# Altium PCB BOARD.PcbDoc
Units mm, origin at the board's own origin, x right, y up, seen from the top; angles counter-clockwise.
Board outline 48 x 20 mm, 2 copper layers (Top Layer, Bottom Layer), stack 1.18 mm thick; 22 components, 17 nets, 78 pads, 4 vias.
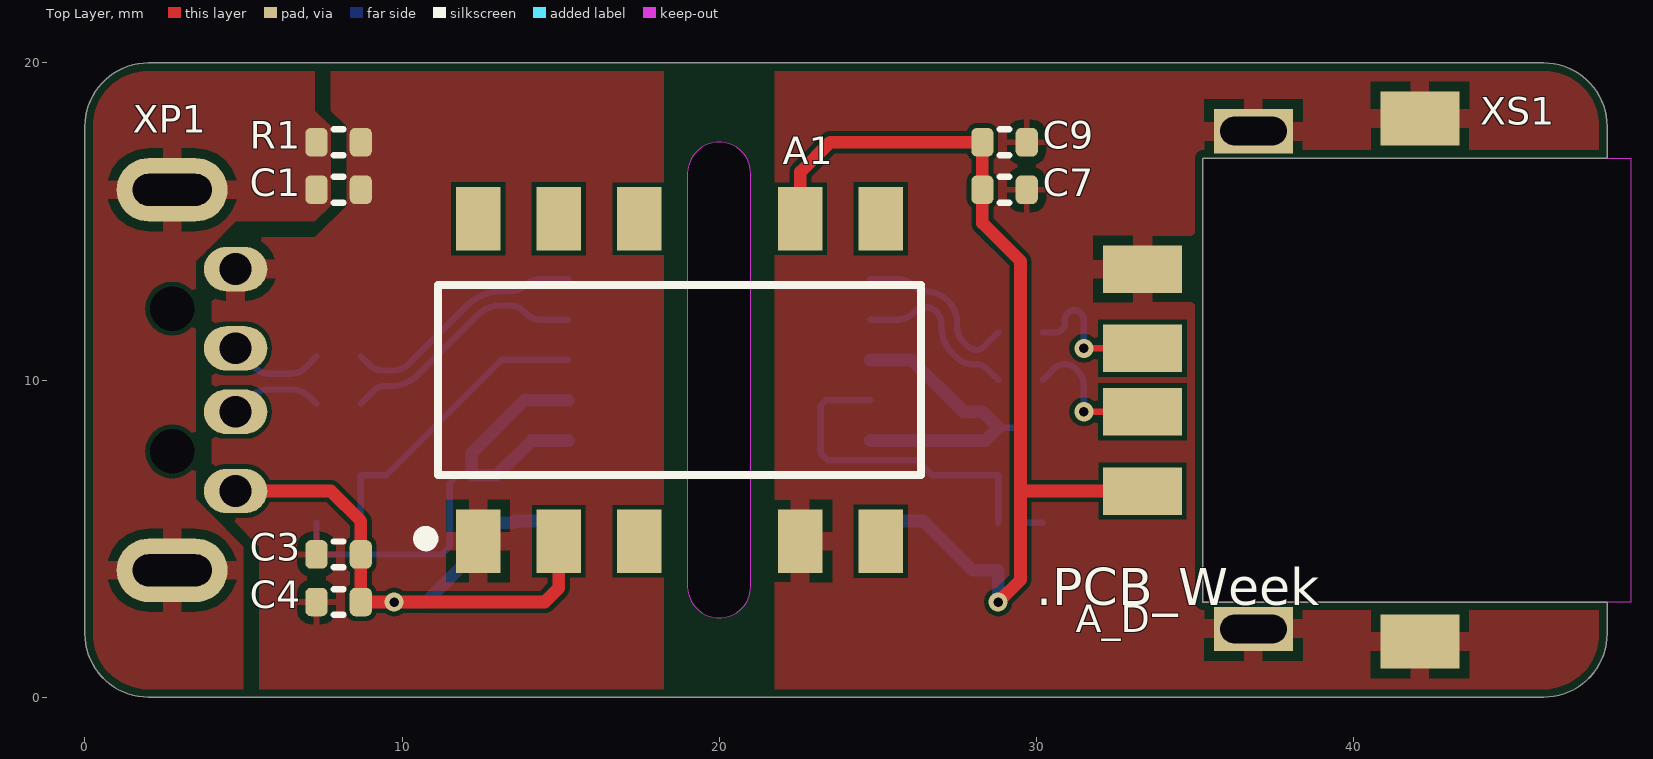
[diagram p0: Top Layer view]
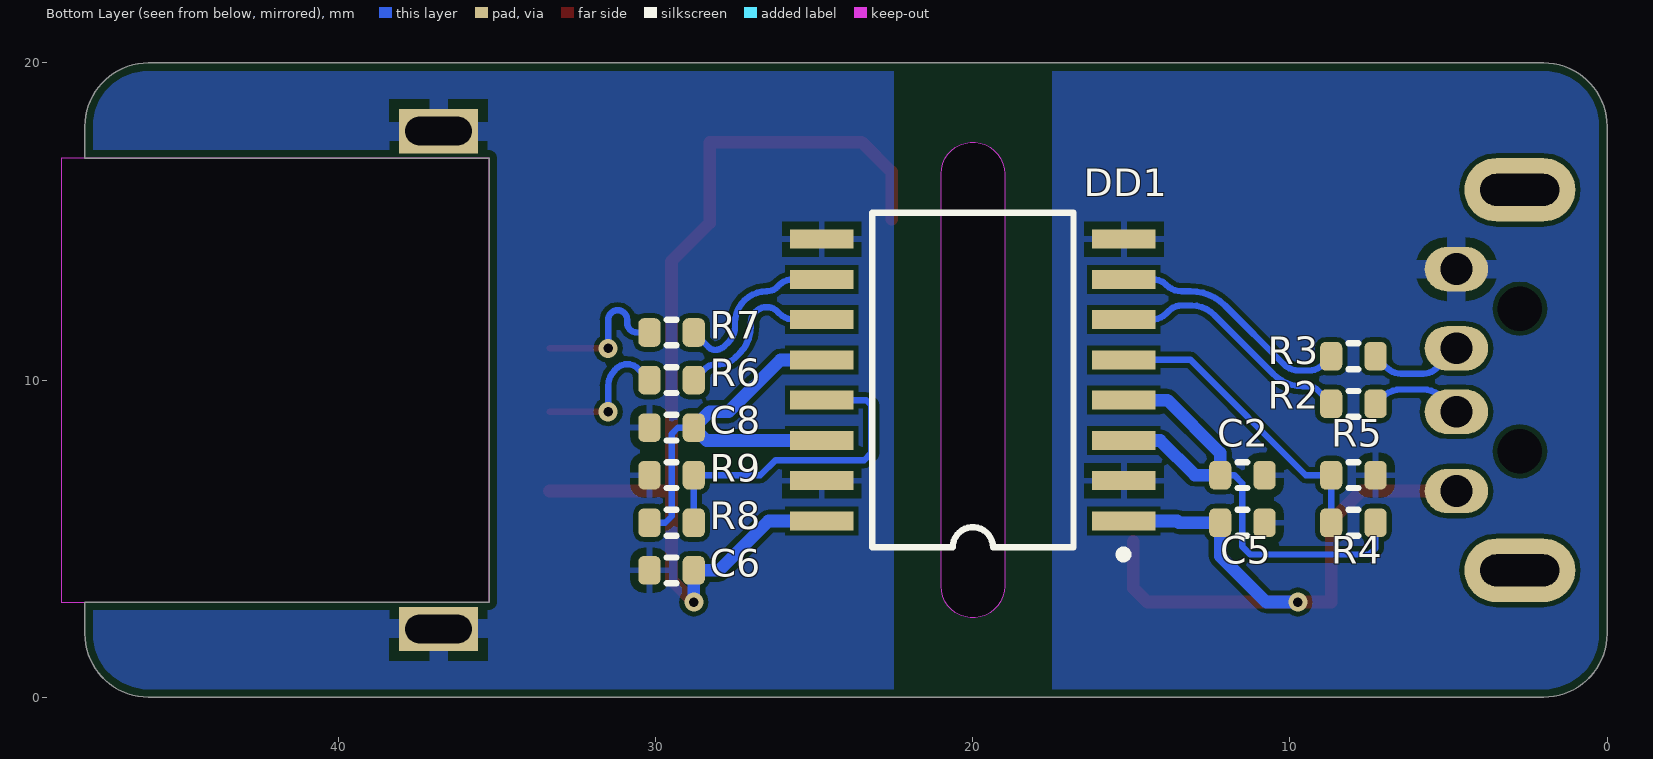
[diagram p1: Bottom Layer view, seen from below]
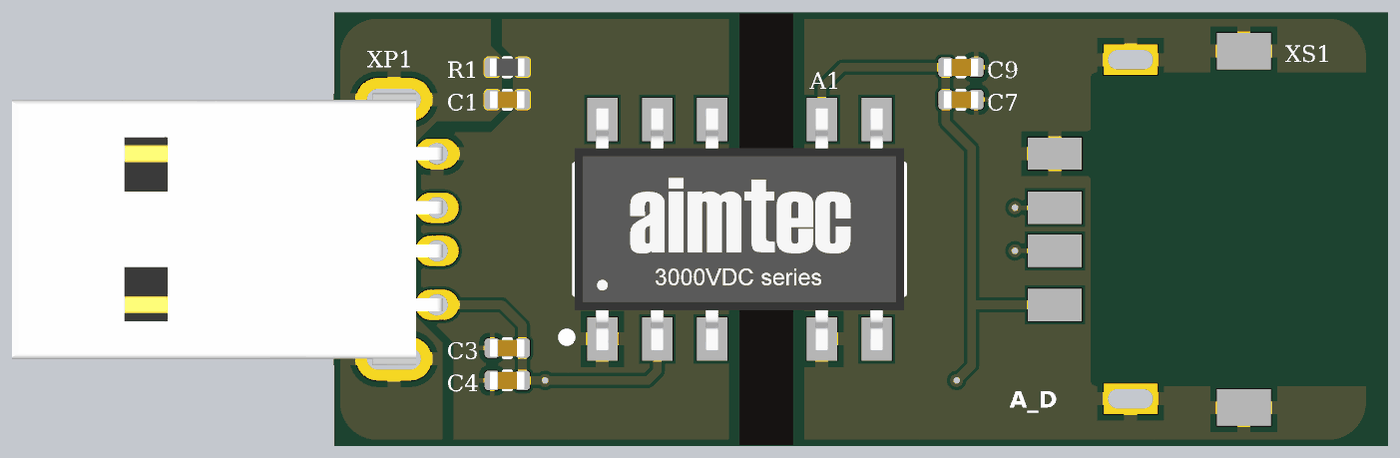
[diagram p2: 3D render of the assembled board from above, using the file's embedded part models]
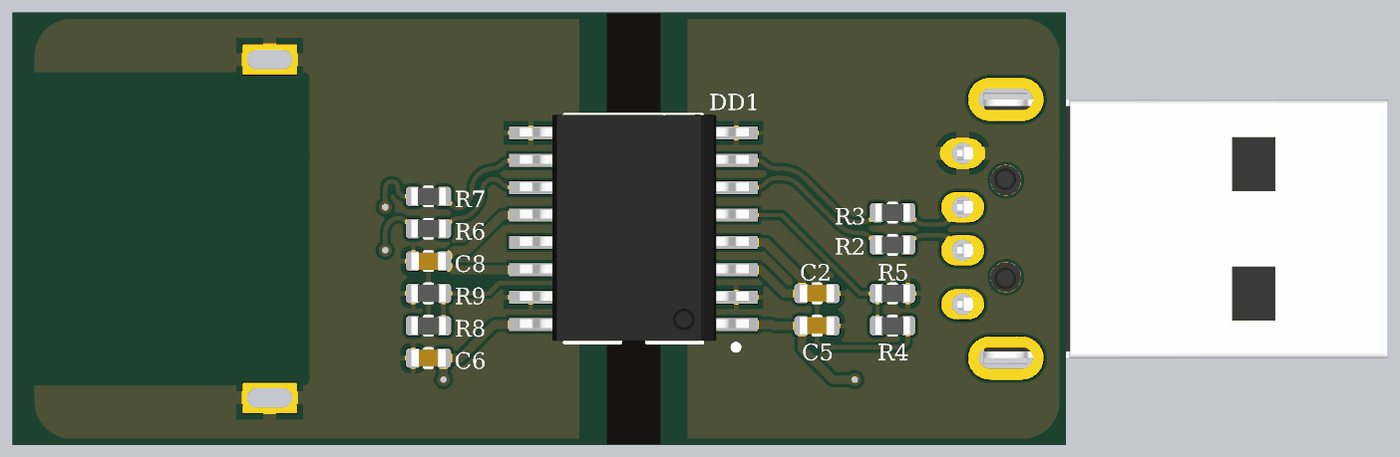
[diagram p3: 3D render of the assembled board from below, using the file's embedded part models]

## Layer stack, top to bottom
Top Solder: solder mask 0.01, Solder Resist, Dk 3.5
Top Layer: signal copper 0.03
Dielectric1: core 1.12, FR-4, Dk 4.2
Bottom Layer: signal copper 0.03
Bottom Solder: solder mask 0.01, Solder Resist, Dk 3.5

## Board outline
0,2 0,18 cw(c2,18) 2,20 46,20 cw(c46,18) 48,18 48,17 35.25,17 35.25,3 48,3 48,2 cw(c46,2) 46,0 2,0 cw(c2,2)
cut-out: 19,3.5 ccw(c20,3.5) 21,3.5 21,16.5 ccw(c20,16.5) 19,16.5

## Design rules (kind name [scope] priority, off if disabled: settings)
BoardOutlineClearance [All] p1: gap=0.25 ignorepadtopadclearanceinfootprint=FALSE
Clearance [All] p1: gap=0.15 ignorepadtopadclearanceinfootprint=FALSE
ComponentClearance [All] p1 off: gap=0.25 collisioncheckmode=3 verticalgap=0.25 showdistances=FALSE
DiffPairsRouting [All] p1: maxlimit=0.4 minlimit=0.15 mostfreqgap=0.25 toplayer_minwidth=0.2 toplayer_maxwidth=0.4 toplayer_prefwidth=0.25 bottomlayer_minwidth=0.2 bottomlayer_maxwidth=0.4 bottomlayer_prefwidth=0.25 maxuncoupledlength=12
Height [All] p1: minheight=0 maxheight=25 prefheight=25
HoleSize [All] p1: absolutevalues=TRUE maxlimit=6 minlimit=0.3 maxpercent=80.000 minpercent=20.000
HoleToHoleClearance [All] p1: gap=0.25 allowstackedmicrovias=TRUE
MinimumSolderMaskSliver [All] p1 off: minsoldermaskwidth=0.254
PlaneClearance [All] p1: clearance=0.5
PlaneConnect [All] p1: planeconnectstyle=Relief reliefexpansion=0.5 reliefentries=4 reliefconductorwidth=0.25 reliefairgap=0.25
PolygonConnect PolygonConnect_DirectConnect [InComponentClass('DirectConnect')] p1: connectstyle=Direct reliefconductorwidth=0.254 reliefentries=4 polygonreliefangle="90 Angle" airgapwidth=0.254
PolygonConnect PolygonConnect_Components [InComponent('C*') OR InComponent('R*') OR InComponent('NR*') OR InComponent('DA*') OR InComponent('DD*') OR InComponent('HL*')] p2: connectstyle=Relief reliefconductorwidth=0.2 reliefentries=4 polygonreliefangle="90 Angle" airgapwidth=0.25
PolygonConnect PolygonConnect_Connectors [All vs (InPadClass('All Pads'))] p3: connectstyle=Relief reliefconductorwidth=0.6 reliefentries=4 polygonreliefangle="90 Angle" airgapwidth=0.3
PolygonConnect PolygonConnect_Via [All] p4: connectstyle=Direct reliefconductorwidth=0.254 reliefentries=4 polygonreliefangle="90 Angle" airgapwidth=0.254
RoutingCorners [All] p1: cornerstyle=45-Degree minsetback=1.5 maxsetback=3.5
RoutingVias [All] p1: holewidth=0.6 width=1.2 viastyle="Through Hole" minholewidth=0.3 minwidth=0.6 maxholewidth=1 maxwidth=2
SMDEntry [All] p1: side=TRUE corner=TRUE anyangle=TRUE
SilkToSilkClearance [All] p1 off: silktosilkclearance=0.254
SilkToSolderMaskClearance [IsPad] p1 off: minsilkscreentomaskgap=0.254 clearancetoexposedcopper=TRUE
SolderMaskExpansion [All] p1: expansion=0.05
Width [All] p1: maxlimit=8 minlimit=0.2 preferedwidth=0.6
Width Width_TrackEnds [All] p2 off: maxlimit=0.25 minlimit=0.25 preferedwidth=0.25 checkconnectedcopper=TRUE
19 further rules are at their usual default settings.

## Classes and differential pairs
component class DirectConnect: C1 R1
differential pair USBD: +USBD_P -USBD_N
differential pair USBDD: +USBDD_P -USBDD_N
differential pair IUSBD: +IUSBD_P -IUSBD_N
differential pair IUSBDD: +IUSBDD_P -IUSBDD_N

## Components (designator, comment, footprint, x,y, rotation, side; value= is the part's Value field where it differs from the comment)
A1 "AM1L-xxxxSH30-Series" AM1L-xxxxSH30-Series 18.75,10 r0 top value=AM1L-0505SH30-NZ
C1 "Capacitor" C0603_L 8,16 r180 top value=0.1uF
C2 "Capacitor" C0603_L 11.5,7 r0 bottom value=0.1uF
C3 "Capacitor" C0603_L 8,4.5 r0 top value=0.1uF
C4 "Capacitor" C0603_L 8,3 r0 top value=10uF
C5 "Capacitor" C0603_L 11.5,5.5 r0 bottom value=0.1uF
C6 "Capacitor" C0603_L 29.5,4 r180 bottom value=0.1uF
C7 "Capacitor" C0603_L 29,16 r180 top value=22uF
C8 "Capacitor" C0603_L 29.5,8.5 r180 bottom value=0.1uF
C9 "Capacitor" C0603_L 29,17.5 r180 top value=0.1uF
DD1 "ADuMx160-Series" SOIC-16_127P1030X750X265_N 20,10 r90 bottom value=ADUM3160BRWZ
R1 "Resistor" R0603_L 8,17.5 r180 top value=0
R2 "Resistor" R0603_L 8,9.25 r0 bottom value=22
R3 "Resistor" R0603_L 8,10.75 r0 bottom value=22
R4 "Resistor" R0603_L 8,5.5 r180 bottom value=0
R5 "Resistor" R0603_L 8,7 r180 bottom value=0
R6 "Resistor" R0603_L 29.5,10 r0 bottom value=22
R7 "Resistor" R0603_L 29.5,11.5 r0 bottom value=22
R8 "Resistor" R0603_L 29.5,5.5 r180 bottom value=0
R9 "Resistor" R0603_L 29.5,7 r180 bottom value=0
XP1 "HOST" DS1097 3,10 r270 top locked value=DS1097-B
XS1 "DEVICE" 2041335-1 48,10 r90 top locked value=2041335-1

## Footprints (in the part's own frame and the unit in brackets; to place one, negate y for a bottom-side part, rotate by r counter-clockwise, add the part's x,y. Pads: shape width x height; smd on the part's side, far side on the other; paste and mask are expansions set on the pad)
2041335-1 [mm]
  rect 1.5x2.5 smd: 1(-3.5,14.65) 2(-1,14.65) 3(1,14.65) 4(3.5,14.65)
  rect 1.7x2.5 smd: 5(-8.25,5.9) 5(8.25,5.9)
  rect 1.4x2.5 hole 0.9 slot 2.1 at 90 deg: 5(-7.85,11.15) 5(7.85,11.15)
  Keep-Out Layer board cut-out: -7,12.75 7,12.75 7,-0.75 -7,-0.75
  body extent -6.75,-1.25 6.75,13.25, height 3.9
AM1L-xxxxSH30-Series [mm] "1 Watt 3kV ISO AIMTEC DC-DC Converter"
  rect 1.4x2 smd: 1(-6.35,-5.08) 2(-3.81,-5.08) 3(-1.27,-5.08) 5(3.81,-5.08) 6(6.35,-5.08) 7(6.35,5.08) 8(3.81,5.08) 9(-1.27,5.08) 10(-3.81,5.08) 12(-6.35,5.08)
  silkscreen extent -8.2,-5.2 7.62,3, body extent -7.62,-5.62 7.62,5.62, height 6.45
C0603_L [mm] "Chip Capacitor; Body 1.6 x 0.8 mm (LxW typ)"
  rrect50% 0.7x0.9 smd: 1(-0.7,0) 2(0.7,0)
  silkscreen extent -0.15,-0.41 0.15,0.41, body extent -0.8,-0.4 0.8,0.4, height 0.91
DS1097 [mm]
  round 0 hole 1.4: 0(-2.25,-0.25) 0(2.25,-0.25)
  oval 1.4x2 hole 1: 1(3.5,1.75) 2(1,1.75) 3(-1,1.75) 4(-3.5,1.75)
  oval 2x3.5 hole 1 slot 2.5 at 90 deg: 5(-6,-0.25) 5(6,-0.25)
  body extent -6.3,-17.93 6.3,2, height 3.3
R0603_L [mm] "Chip Resistor; Body 1.6 x 0.8 mm (LxW typ)"
  rrect50% 0.7x0.9 smd: 1(-0.7,0) 2(0.7,0)
  silkscreen extent -0.15,-0.41 0.15,0.41, body extent -0.8,-0.41 0.8,0.41, height 0.46
SOIC-16_127P1030X750X265_N [mm]
  rect 0.6x2 smd: 1(-4.445,-4.763) 2(-3.175,-4.763) 3(-1.905,-4.763) 4(-0.635,-4.763) 5(0.635,-4.763) 6(1.905,-4.763) 7(3.175,-4.763) 8(4.445,-4.763) 9(4.445,4.763) 10(3.175,4.763) 11(1.905,4.763) 12(0.635,4.763) 13(-0.635,4.763) 14(-1.905,4.763) 15(-3.175,4.763) 16(-4.445,4.763)
  silkscreen extent -5.62,-4.87 5.27,3.18, body extent -5.21,-5.33 5.29,5.27, height 2.57

## Part data
A1: library part AM1L-0505SH30-NZ, Manufacturer=Aimtec, Output Current Max=±200mA, Output Current Min=±20mA, Output Voltage=+5V, Working Temperature Max=+85°С, Working Temperature Min=-40°С, Application Category=1, Efficiency=70%, Functional Analog=-, I-O Isolation=3kV, ID=2, Part Number=AM1L-0505SH30-NZ, Published=29.07.2015, Publisher="Andrew Danich", Supply Operation=+4.5…5.5V, Type=Модуль
C1 C2 C3 C5 C6 C8 C9: library part GRM188R72A104KA35D, Dielectric Type=X7R, Manufacturer=Murata, Tolerance=±10%, Voltage=100V, Working Temperature Max=+125°С, Working Temperature Min=-55°С, Application Category=1, ID=232, Part Number=GRM188R72A104KA35D, Published=18.05.2010, Publisher="Andrew Danich", Type=Конденсатор
  C1: ClassName=DirectConnect
C4: library part GRM188R61A106KE69D, Dielectric Type=X5R, Manufacturer=Murata, Tolerance=±10%, Voltage=10V, Working Temperature Max=+85°С, Working Temperature Min=-55°С, Application Category=1, ID=173, Part Number=GRM188R61A106KE69D, Published=18.05.2010, Publisher="Andrew Danich", Type=Конденсатор
C7: library part GRM188R61A226ME15D, Dielectric Type=X5R, Manufacturer=Murata, Tolerance=±20%, Voltage=10V, Working Temperature Max=+85°С, Working Temperature Min=-55°С, Application Category=1, ID=256, Part Number=GRM188R61A226ME15D, Published=18.05.2010, Publisher="Andrew Danich", Type=Конденсатор
DD1: library part ADUM3160BRWZ, Manufacturer="Analog Devices", Supply Current=8mA, Application Category=1, Data Rate=12Mbts, Forward Channels=2, Functional Analog=ADUM4160BRWZ, ID=1, Interface="USB 2.0", Opposite Channels=2, Part Number=ADUM3160BRWZ, Peak-to-peak Jitter=3ns, Published=29.07.2015, Publisher="Andrew Danich", Supply Operation=+4.5…5.5V, Type=Микросхема
R1 R4 R5 R8 R9: library part RC0603JR-070R, Limit Voltage=50V, Manufacturer=Yageo, Temperature Coefficient=100ppm, Tolerance=±5%, Total Power Dissipation=0.1W, Working Temperature Max=+155°С, Working Temperature Min=-55°С, Application Category=1, Functional Analog="RC0603FR-070RL, CR0603-J/-000E", ID=5, Part Number=RC0603JR-070R, Published=24.03.2010, Publisher="Andrew Danich", Series Type=Thick-Film, Type=Резистор
  R1: ClassName=DirectConnect
R2 R3 R6 R7: library part RC0603JR-0722RL, Limit Voltage=50V, Manufacturer=Yageo, Temperature Coefficient=100ppm, Tolerance=±5%, Total Power Dissipation=0.1W, Working Temperature Max=+155°С, Working Temperature Min=-55°С, Application Category=1, ID=29, Part Number=RC0603JR-0722RL, Published=24.03.2010, Publisher="Andrew Danich", Series Type=Thick-Film, Type=Резистор
XP1: library part DS1097-B, Limit Current=1.5A, Limit Voltage=30V, Manufacturer="Connfly Electronic Co., Ltd", Application Category=1, Connector Type=Male, Functional Analog="USB-AR, DS1097-W", ID=3, Interface="USB 2.0", Max Data Rate="480 mbps", Mount Type="Through hole", Part Number=DS1097-B, Pins=6, Published=13.08.2015, Publisher="Andrew Danich", Type=Вилка
XS1: library part 2041335-1, Limit Current=1.5A, Limit Voltage=30V, Manufacturer="TE Connectivity", Application Category=1, Connector Type=Female, Functional Analog="Jing Extension of the Electronic Co. A/FLCPVinyl", ID=39, Interface="USB 2.0", Max Data Rate="480 mbps", Mount Type=Surface, Part Number=2041335-1, Pins=5, Published=07.03.2013, Publisher="Andrew Danich", Type=Розетка

## Via types
v1: diameter 0.6, hole 0.3, Top Layer to Bottom Layer, tented both sides, 4 vias

## Nets (pads, with @x,y where several pads share a name; then routed paths per layer and width w, separated by ;. In a path a pad name is that pad's centre, name@x,y a point inside that pad or via, vN(x,y) a via of type N, cw(c..) or ccw(c..) an arc to the next point about the centre after c; other vN are vias at no path point)
GND: A1.1 C1.1 C2.1 C3.1 C4.1 C5.1 DD1.2 DD1.8 R1.1 R5.2 XP1.4
IGND: A1.5 C6.1 C7.1 C8.1 C9.1 DD1.9 DD1.15 R9.1 XS1.4 XS1.5
IUSBD_N: R6.2 XS1.2 | length 4.6
  Top Layer w0.2: v1(31.5,9) XS1.2
  Bottom Layer w0.2: R6.2 30.559,10.359 cw(c30.9,10.017) 30.9,10.5 cw(c30.9,10.017) 31.241,10.359 31.3,10.3 cw(c30.817,9.817) 31.5,9.817 v1(31.5,9)
IUSBD_P: R7.2 XS1.3 | length 4.7
  Top Layer w0.2: v1(31.5,11) XS1.3
  Bottom Layer w0.2: R7.2 30.6,11.5 ccw(c30.6,11.8) 30.9,11.8 30.9,11.9 cw(c31.2,11.9) 31.2,12.2 cw(c31.2,11.9) 31.5,11.9 v1(31.5,11)
IUSBDD_N: DD1.11 R6.1 | length 5.4
  Bottom Layer w0.2: DD1.11 25.629,11.905 ccw(c25.629,12.571) 26.1,12.1 26.159,12.159 cw(c26.5,11.817) 26.5,12.3 cw(c26.5,11.8) 27,11.8 27,11.7 ccw(c28.207,11.7) 27.353,10.847 27.5,10.7 ccw(c27.983,11.183) 27.983,10.5 28.1,10.5 cw(c28.1,10.017) 28.441,10.359 R6.1
IUSBDD_P: DD1.10 R7.1 | length 5.5
  Bottom Layer w0.2: DD1.10 25.678,13.175 cw(c25.678,12.578) 26.1,13 26.159,12.941 ccw(c26.5,13.283) 26.5,12.8 cw(c26.5,11.8) 27.5,11.8 27.5,11.683 ccw(c28.183,11.683) 27.7,11.2 27.821,11.079 ccw(c28.132,11.39) 28.132,10.95 ccw(c28.132,11.234) 28.333,11.033 R7.1
NetC1_2: C1.2 R1.2 XP1.5
NetDD1_5: DD1.5 R4.1 R5.1 | length 9.5
  Bottom Layer w0.2: R4.1 R5.1 9.5,7 13.135,10.635 DD1.5
NetDD1_13: DD1.13 R8.2 R9.2 | length 10.5
  Bottom Layer w0.2: DD1.13 23.365,9.365 23.2,9.2 23.2,7.7 23.425,7.475 26.225,7.475 26.7,7 R9.2 R8.2
USBD_N: R2.1 XP1.2 | length 3
  Bottom Layer w0.2: XP1.2 5.203,9.453 cw(c5.8,8.855) 5.8,9.7 6.5,9.7 cw(c6.5,8.855) 7.097,9.453 R2.1
USBD_P: R3.1 XP1.3 | length 3.1
  Bottom Layer w0.2: XP1.3 5.373,10.377 ccw(c5.8,10.804) 5.8,10.2 6.5,10.2 ccw(c6.5,10.804) 6.927,10.377 R3.1
USBDD_N: DD1.6 R2.2 | length 7.8
  Bottom Layer w0.2: R2.2 9.144,9.694 ; 9.144,9.694 cw(c9.4,9.438) 9.4,9.8 9.596,9.8 ccw(c9.596,11.104) 10.518,10.182 12.395,12.059 cw(c13.098,11.357) 13.098,12.35 13.417,12.35 cw(c13.417,11.788) 13.815,12.185 13.9,12.1 ccw(c14.371,12.571) 14.371,11.905 DD1.6
USBDD_P: DD1.7 R3.2 | length 7.7
  Bottom Layer w0.2: R3.2 8.973,10.477 ccw(c9.4,10.904) 9.4,10.3 9.717,10.3 ccw(c9.717,10.983) 10.2,10.5 12.05,12.35 ; 12.05,12.35 cw(c13.136,11.264) 13.136,12.8 13.417,12.8 ccw(c13.417,13.483) 13.9,13 cw(c14.322,12.578) 14.322,13.175 DD1.7
VBUS1: A1.2 C3.2 C4.2 C5.2 DD1.1 XP1.1 | length 22
  Top Layer w0.4: XP1.1 7.75,6.5 8.7,5.55 C3.2 C4.2 v1(9.75,3) 14.5,3 14.94,3.44 A1.2
  Bottom Layer w0.4: v1(9.75,3) 10.75,3 12.2,4.45 C5.2 13.5,5.5 13.555,5.555 DD1.1
VBUS2: A1.8 C6.2 C7.2 C9.2 DD1.16 XS1.1 | length 32.4
  Top Layer w0.4: A1.8 22.56,16.56 23.5,17.5 C9.2 C7.2 28.3,14.95 29.5,13.75 29.5,6.5 ; v1(28.8,3) 29.5,3.7 29.5,6.5 ; XS1.1 29.5,6.5
  Bottom Layer w0.4: DD1.16 26.445,5.555 28,4 C6.2 v1(28.8,3)
VDD1: C2.2 DD1.3 DD1.4 R4.2 | length 15.9
  Bottom Layer w0.2: R4.2 7.3,4.7 7.5,4.5 11.25,4.5 11.5,4.75 11.5,6.75 11.75,7 C2.2
  Bottom Layer w0.4: DD1.3 14.095,8.095 13,7 C2.2 12.2,7.7 13.865,9.365 DD1.4
VDD2: C8.2 DD1.12 DD1.14 R8.1 | length 13.3
  Bottom Layer w0.2: C8.2 29.3,8.5 29.5,8.3 29.5,5.7 29.7,5.5 R8.1
  Bottom Layer w0.4: DD1.14 28.395,8.095 C8.2 28.3,9 27.7,9 26.065,10.635 DD1.12
pads on no net: A1.3 A1.6 A1.7 A1.9 A1.10 A1.12 XP1.0

## Polygon pours and split planes (outlines as drawn)
IGND on Bottom Layer "IGND_L02_P002" (solid, remove dead copper, pour order 2): 20,20 48,20 48,0 20,0
GND on Bottom Layer "GND_L02_P000" (solid, remove dead copper, pour order 0): 0,20 20,20 20,0 0,0
IGND on Top Layer "IGND_L01_P008" (solid, remove dead copper, pour order 8): 20,20 48,20 48,0 20,0
GND on Top Layer "GND_L01_P006" (solid, remove dead copper, pour order 6): 7.75,20 20,20 20,0 5.5,0 5.5,4.75 4,6.25 4,13.5 4.915,14.5 7.25,14.5 8.25,15.5 8.25,18 7.75,18.5
NetC1_2 on Top Layer "NETC1_2_L01_P004" (solid, remove dead copper, pour order 4): 0,0 5,0 5,4.75 3.5,6.25 3.5,13.75 4.75,15 7.25,15 7.75,15.5 7.75,18 7.25,18.5 7.25,20 0,20
no net on Top Solder "IGND_L01_P-001" (solid, remove dead copper): 18.75,20

## Other copper
Top Layer:
  pour cut-out: 18.25,20 21.75,20 21.75,0 18.25,0
Bottom Layer:
  pour cut-out: 17.5,20 22.5,20 22.5,0 17.5,0

## Silkscreen, mask and mechanical layers (free items; w line width, h text height)
Top Overlay:
  text ".PCB_Week" at 30,2.5 h2
  text "A_D" at 31.25,1.75 h1.5
Top Solder:
  rectangle: 18.75,0 21.25,20
Bottom Solder:
  rectangle: 18.75,0 21.25,20
1 - Board Outline:
  lines w0.1: 0,2 ccw(c2,2) 2,0 46,0 ccw(c46,2) 48,2 48,3 35.25,3 35.25,17 48,17 48,18 ccw(c46,18) 46,20 2,20 ccw(c2,18) 0,18 0,2
  lines w0.2: 19,3.5 ccw(c20,3.5) 21,3.5 21,16.5 ccw(c20,16.5) 19,16.5 19,3.5